# EAGLE board Brüt Rüt and Diod OR Front Panel v1.3 (EAGLE 7.2.0)

Size 30.48 x 43.18 mm. Coordinates in mm from the lower left corner, seen from the top.
Outline: 0,0 30.48,0 30.48,43.18 0,43.18 0,0
Copper layers (1*16): Top 0.035mm / dielectric 1.5mm / Bottom 0.035mm
Design rules "default": minimum track width 10mil, minimum drill 24mil, track to track 8mil, track to pad 8mil, pad to pad 8mil, via to via 8mil, smd to smd 8mil, copper to edge 40mil, drill to drill 8mil, minimum pad ring 10mil, minimum via ring 8mil, stop-mask expansion 4mil, vias tented up to drill 0mil, thermal gap 10mil
Holes 3.17 mm at 25.27,3 4.95,40.18
Holes 6.35 mm at 8.13,28.32 22.35,28.32 22.35,14.86 8.13,14.86

## Placement (x,y rotation side)
E$1  [OSHW-LOGO-M]  7.58,3.11 0 top
E$2  [PCB_SM_CYCLONE]  15.24,3.56 0 top
E$3  [OSHW-LOGO-M]  7.58,3.11 0 bottom
E$4  [PCB_SM_CYCLONE]  15.24,3.56 0 bottom

## Library data of the parts
E$1 E$3 = SparkFun-Aesthetics
E$2 E$4 = tsyklon-pcb-graphics

## Text on the board
tPlace: DIOD OR | IN | IN | IN | OR
bPlace: BRUT RUT | GATE | CV | GATE | CV